# Altium PCB PCB3.PcbDoc
Units mm, origin at the board's own origin, x right, y up, seen from the top; angles counter-clockwise.
Board outline 90 x 92 mm, 2 copper layers (Top Layer, Bottom Layer); 24 components, 23 nets, 87 pads, 0 vias.
Unrouted connection lines stored in the file: 3.
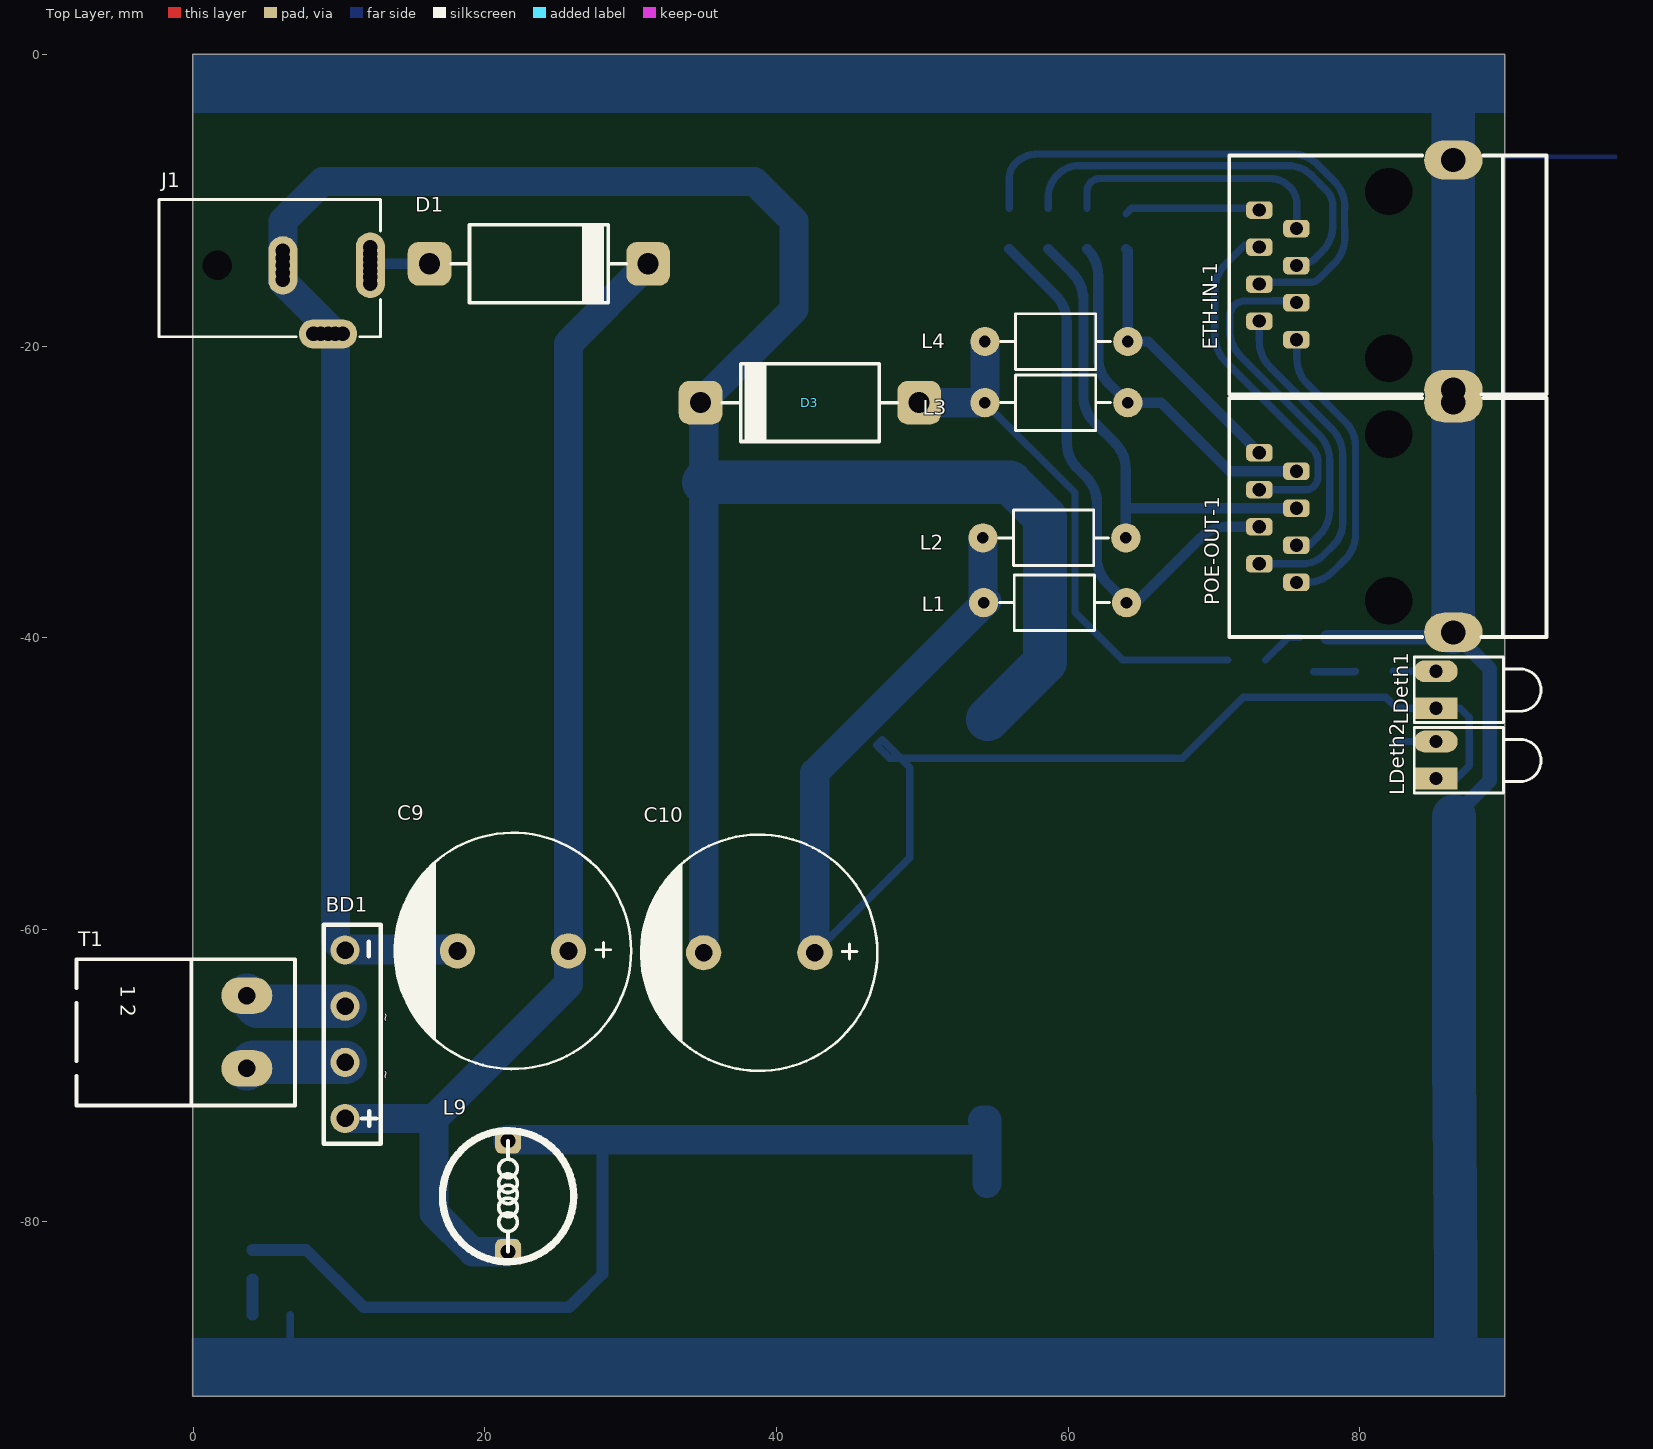
[diagram p0: Top Layer view]
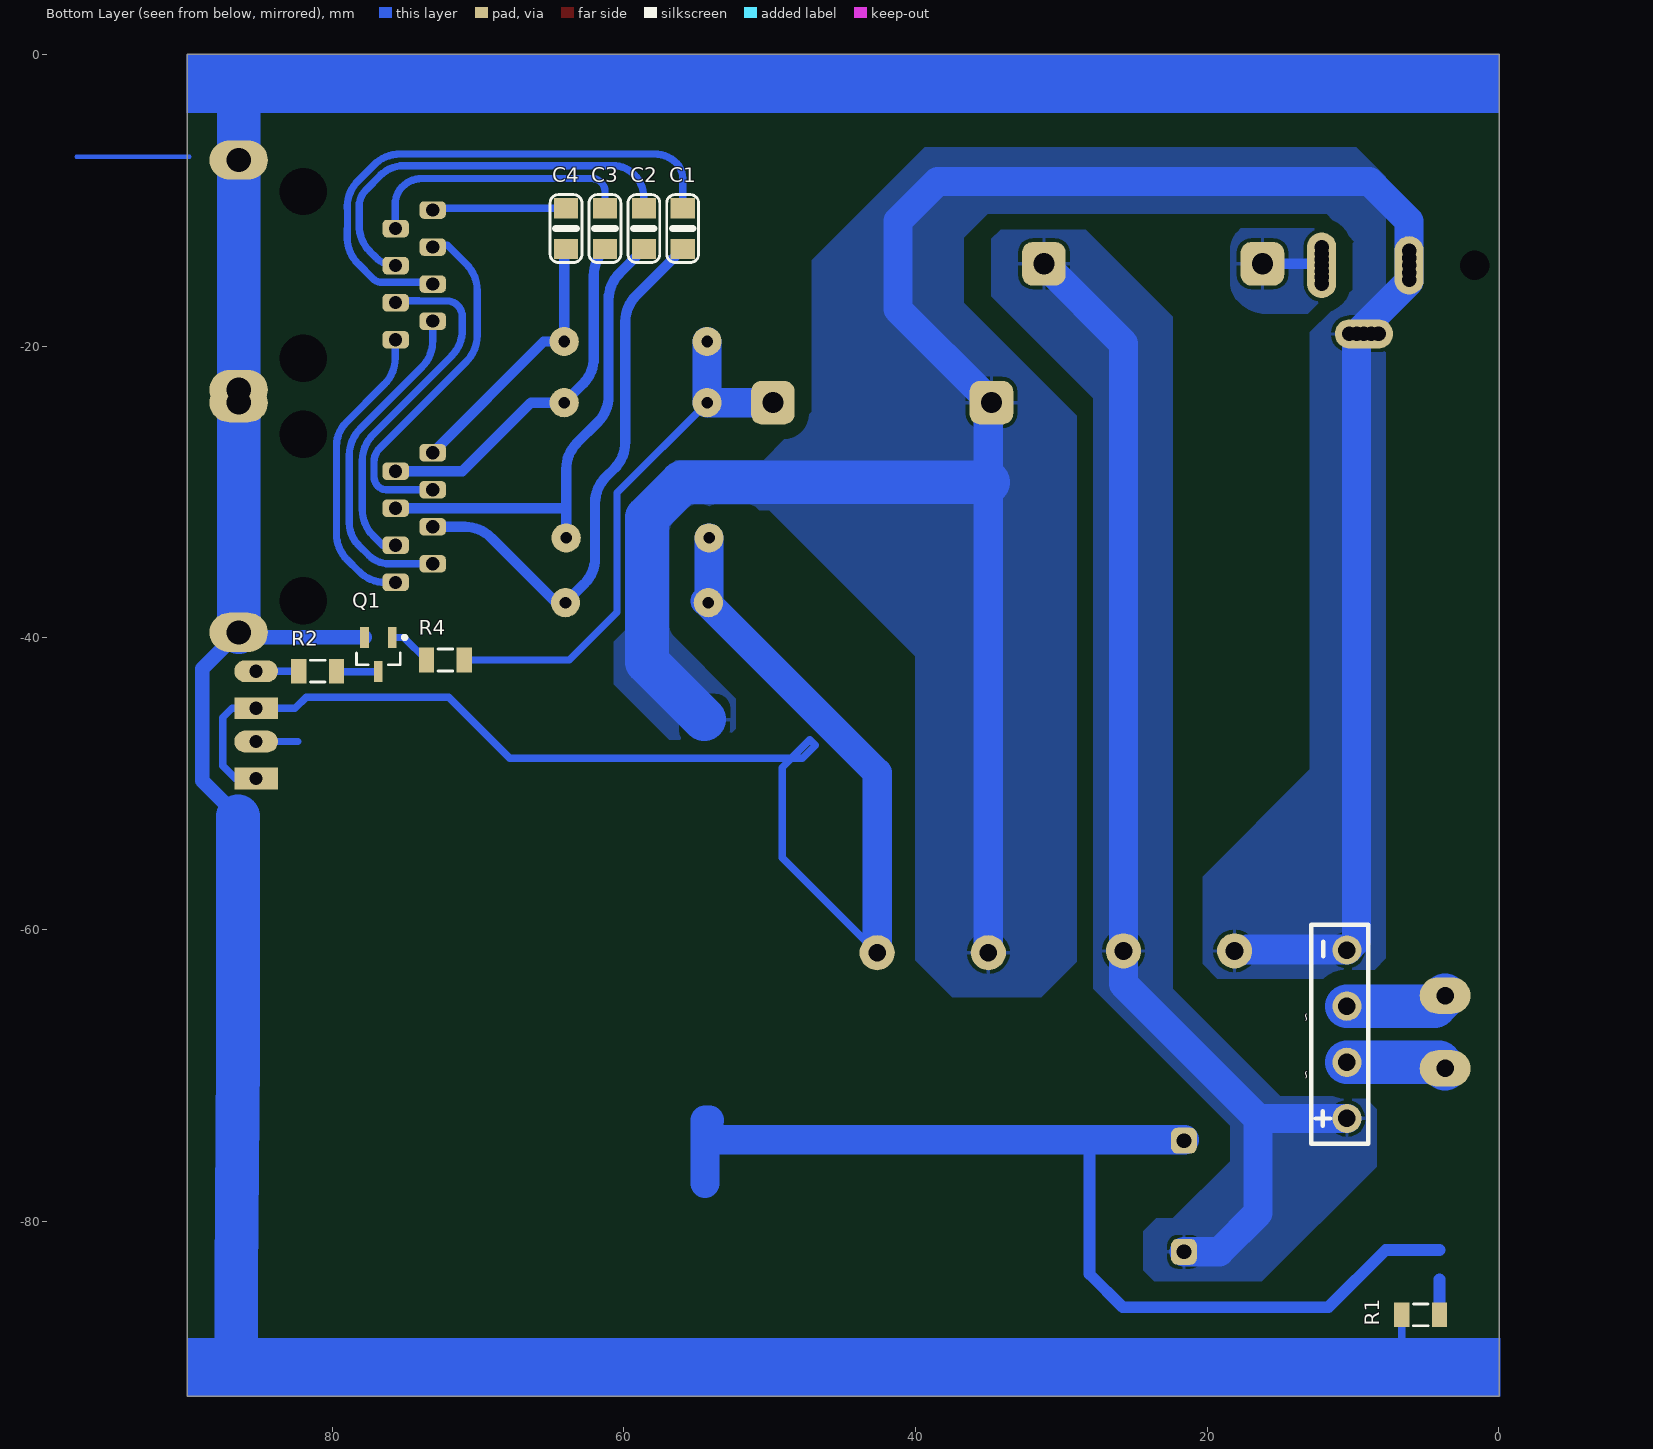
[diagram p1: Bottom Layer view, seen from below]
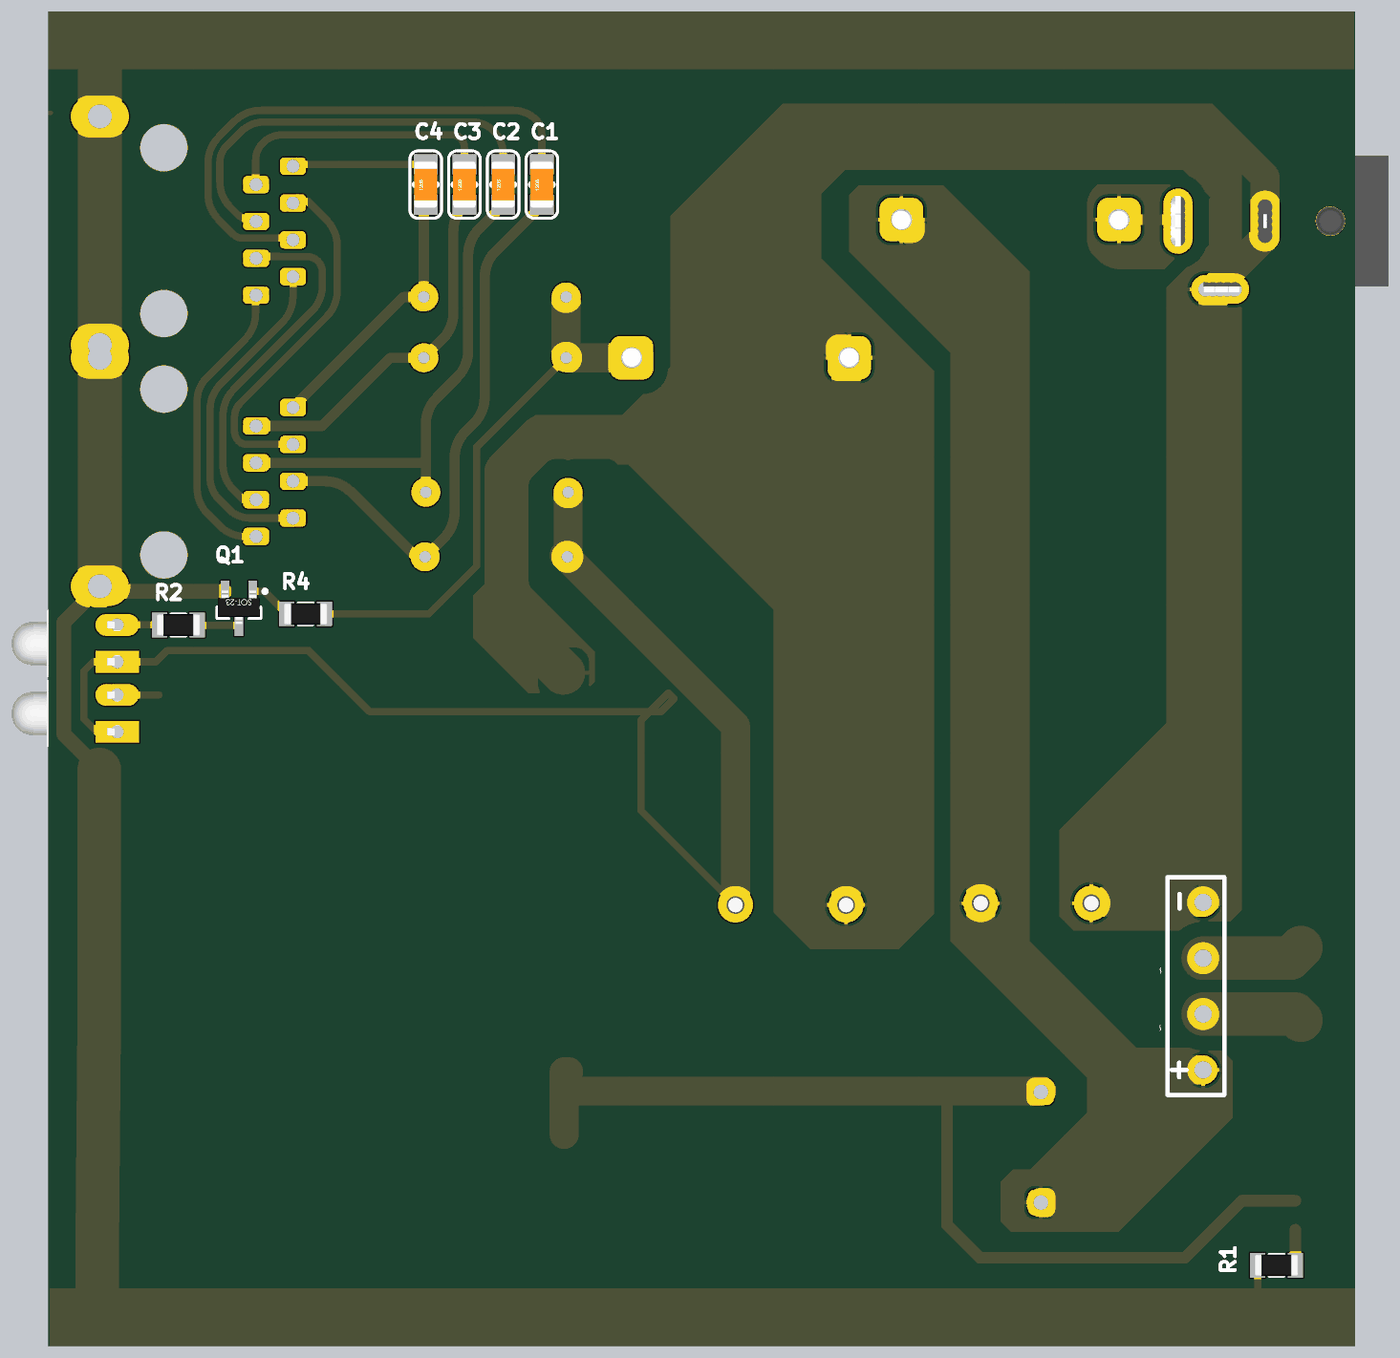
[diagram p2: 3D render of the assembled board from below, using the file's embedded part models]

## Layer stack, top to bottom
Top Solder: solder mask 0.0102, Solder Resist, Dk 3.5
Top Layer: signal copper 0.0356
Dielectric 1: dielectric 0.32, FR-4, Dk 4.8
Bottom Layer: signal copper 0.0356
Bottom Solder: solder mask 0.0102, Solder Resist, Dk 3.5

## Board outline
-0.043,-92 -0.043,0 89.957,0 89.957,-92

## Design rules (kind name [scope] priority, off if disabled: settings)
Clearance [All] p1: gap=0.3 ignorepadtopadclearanceinfootprint=FALSE
PolygonConnect [All] p1: connectstyle=Relief reliefconductorwidth=0.254 reliefentries=4 polygonreliefangle="90 Angle" airgapwidth=0.254
RoutingVias [All] p1: holewidth=0.711 width=1.27 viastyle="Through Hole" minholewidth=0.711 minwidth=1.27 maxholewidth=0.711 maxwidth=1.27
SolderMaskExpansion [All] p1: expansion=0.102 istentingtop=FALSE
Width [All] p1: maxlimit=3 minlimit=0.3 preferedwidth=0.4
30 further rules are at their usual default settings.

## Components (designator, comment, footprint, x,y, rotation, side; value= is the part's Value field where it differs from the comment)
BD1 "Bridge Diode" "Diode Bridge rectifier" 10.414,-67.186 r90 top
C1 "Capacitor SMD" "1206 Capacitor" 55.964,-11.938 r90 bottom
C2 "Capacitor SMD" "1206 Capacitor" 58.631,-11.938 r90 bottom
C3 "Capacitor SMD" "1206 Capacitor" 61.298,-11.938 r90 bottom
C4 "Capacitor SMD" "1206 Capacitor" 63.965,-11.938 r90 bottom
C9 "1000uF" "CAP 05" 21.928,-61.468 r0 top
C10 "1000uF" "CAP 05" 38.819,-61.595 r0 top
D1 "BYW98" BYW98 23.706,-14.351 r0 top
D3 "BYW98" BYW98 42.291,-23.876 r180 top
ETH-IN-1 "RJ45-w57-1" rj45-hb 86.364,-7.239 r270 top
J1 "Power Jack" "Power Jack" -2.351,-14.458 r0 top
L1 "300uH" inductor 54.282,-37.592 r90 top
L2 "300uH" inductor 54.229,-33.147 r90 top
L3 "300uH" inductor 54.366,-23.876 r90 top
L4 "300uH" inductor 54.366,-19.685 r90 top
L9 "10-100uH" "Inductor Radial" 21.59,-78.295 r270 top
LDeth1 "SMD LED" "LED 1 X  3mm GREEN RIGHT ANGLE" 85.217,-43.561 r90 top
LDeth2 "SMD LED" "LED 1 X  3mm GREEN RIGHT ANGLE" 85.217,-48.387 r90 top
POE-OUT-1 "RJ45-w57-1" rj45-hb 86.364,-23.877 r270 top
Q1 "BC817" SOT-23 76.835,-41.148 r0 bottom
R1 "10k" "RES 1206 (3216X08L)" 6.66,-86.423 r180 bottom
R2 "10k" "RES 1206 (3216X08L)" 79.7,-42.291 r0 bottom
R4 "10k" "RES 1206 (3216X08L)" 73.533,-41.529 r180 bottom
T1 "Phoenix terminal" "phoenix terminal 2" -8.001,-62.039 r270 top

## Footprints (in the part's own frame and the unit in brackets; to place one, negate y for a bottom-side part, rotate by r counter-clockwise, add the part's x,y. Pads: shape width x height; smd on the part's side, far side on the other; paste and mask are expansions set on the pad)
"1206 Capacitor" [mil]
  rect 55x65 smd: 1(-55,0) 2(55,0)
  silkscreen extent -92,-43 92,43, body extent -63,-31 63,31, height 39
BYW98 [mm]
  rrect50% 3x3 hole 1.448: 1(-7.493,0) 2(7.493,0)
  silkscreen extent -6,-2.67 6,2.67, body extent -8.14,-2.68 8.16,2.62, height 6.46
"CAP 05" [mil]
  round 95 hole 48: 1(150,0) 2(-150,0)
  silkscreen extent -319,-319 319,319, body extent -320,-320 320,320, height 651
"Diode Bridge rectifier" [mm]
  round 2 hole 1.2: 1(5.775,0) 2(1.925,0) 3(-1.925,0) 4(-5.775,0)
  silkscreen extent -7.5,-2.45 7.5,1.45, body extent -7.5,-2.45 7.5,1.45, height 13.1
inductor [mm]
  round 2 hole 0.8: 1(0,0.074) 2(0,-9.726)
  silkscreen extent -1.91,-8.54 1.91,-1.01
"Inductor Radial" [mil]
  rrect50% 70x70 hole 40: 1(-150,0) 2(150,0)
  silkscreen extent -177,-177 177,177, body extent -177,-177 177,177, height 464
"LED 1 X  3mm GREEN RIGHT ANGLE" [mm]
  rect 1.5x3 hole 0.9: 1(-1.27,0)
  oval 1.5x3 hole 0.9: 2(1.27,0)
  silkscreen extent -2.25,-7.21 2.25,1.48, body extent -2.31,-7.27 2.31,1.49, height 7.31
"phoenix terminal 2" [mm] "2 terminals"
  oval 2.5x3.5 hole 1.2: 1(2.493,11.684) 2(7.493,11.684)
  silkscreen extent 0,0 10.03,15
"Power Jack" [mm] "Power Adaptor Jack"
  round 1.5 hole 1: 1(14.5,-1.25) 1(14.5,-0.8) 1(14.5,-0.4) 1(14.5,0.4) 1(14.5,0.8) 1(14.5,1.25) 2(8.5,-1) 2(8.5,1) 2(8.5,-0.5) 2(8.5,0.5) 3(10.6,-4.7) 3(11.1,-4.7) 3(12.1,-4.7) 3(12.6,-4.7)
  oval 2x4.5 hole 1: 1(14.5,0)
  oval 2x4 hole 1: 2(8.5,0)
  oval 4x2 hole 1: 3(11.6,-4.7)
  round 1.9 hole 2: MH(4,0)
  silkscreen extent 0,-4.9 15.2,4.5, body extent 0,-4.9 15.2,4.5, height 11
"RES 1206 (3216X08L)" [mm] "Chip Resistor, 2-Leads, Body 3.2x1.6mm, IPC High Density _ (0.125 W)"
  rect 1.05x1.7 smd: 1(0,0) 2(2.596,0)
  silkscreen extent 0.8,-0.75 1.8,0.75, body extent -0.23,-0.76 2.82,0.76, height 0.6
rj45-hb [mm]
  rrect50% 1.2x1.8 hole 0.9: 1(12.319,-10.714) 2(11.049,-13.254) 3(9.779,-10.714) 4(8.509,-13.254) 5(7.239,-10.714) 6(5.969,-13.254) 7(4.699,-10.714) 8(3.429,-13.254)
  oval 2.7x4 hole 1.65: G1(15.749,0.046) G2(-0.001,0.046)
  rrect50% 1.8x1.8 hole 3.25: ""(2.159,-4.365) ""(13.589,-4.365)
  silkscreen extent -0.32,-15.31 16.06,6.44
SOT-23 [mm]
  rect 0.6x1.45 smd: 1(-0.95,-1.175) 2(0.95,-1.175) 3(0,1.175)
  silkscreen extent -1.92,-1.3 1.5,0.7, body extent -1.45,-1.23 1.45,1.07, height 1

## Part data
BD1: library part "Diode Bridge rectifier"
C9 C10: library part Cap-Polar, "Polar Capacitor", Voltage=50V, Adding Date=1387/12/20, Designer="Saeid Jorablo", Organazation=ControTec
D1 D3: "HIGH EFFICIENCY FAST RECOVERY RECTIFIER DIODES", Adding Date=1387/01/10, Company=ControTEK, Designer="Saeid Jorablo", IF(av)="3 A", Trr (max)="35 ns", Vrrm="200 V"
L1 L2 L3 L4 L9: library part "Inductor SMT"
LDeth1 LDeth2: library part "LED SMD"
R1 R2 R4: library part Resistor, "Resistor", Power="1/8 W", Tolerance=5%
T1: library part "Phoenix terminal 2", "Terminal 2 Pin", ComponentLinkURL=www.picpars.com, Designer="Seyed Mohsen Ghasemain", E-mail=picpars@gmail.com
J1: Adding Date=10/21/2009, Company=Personal, Designer="Saeid Jorablo", Project Name=Laser

## Nets (pads, with @x,y where several pads share a name; then routed paths per layer and width w, separated by ;. In a path a pad name is that pad's centre, name@x,y a point inside that pad or via, vN(x,y) a via of type N, cw(c..) or ccw(c..) an arc to the next point about the centre after c; other vN are vias at no path point)
1TxRxA+: ETH-IN-1.1 POE-OUT-1.1 | length 20.7
  Bottom Layer w0.5: POE-OUT-1.1 76.374,-36.196 ccw(c76.374,-33.656) 78.17,-35.452 78.969,-34.653 ccw(c77.173,-32.857) 79.713,-32.857 79.713,-26.865 ccw(c77.402,-26.865) 79.037,-25.232 ccw(c77.402,-26.865) 79.036,-25.231 76.427,-22.622 cw(c78.223,-20.826) 75.683,-20.826 ETH-IN-1.1@75.683,-19.43
1TxRxA-: ETH-IN-1.2 POE-OUT-1.2 | length 23.3
  Bottom Layer w0.5: POE-OUT-1.2 76.073,-34.926 ccw(c76.073,-32.886) 77.516,-34.328 78.195,-33.649 ; ETH-IN-1.2 73.109,-19.649 ccw(c75.649,-19.649) 73.143,-20.063 ccw(c75.649,-19.649) 73.853,-21.445 78.08,-25.672 cw(c76.284,-27.468) 78.824,-27.468 78.824,-32.131 cw(c76.678,-32.131) 78.196,-33.648 ; ETH-IN-1.2@73.143,-18.288 ETH-IN-1.2@73.143,-18.16
1TxRxB+: ETH-IN-1.3 POE-OUT-1.3 | length 24.9
  Bottom Layer w0.5: POE-OUT-1.3 76.537,-33.656 77.194,-32.999 ccw(c75.407,-31.211) 77.935,-31.211 77.935,-27.849 ccw(c75.395,-27.849) 77.191,-26.053 71.821,-20.683 cw(c73.617,-18.887) 71.077,-18.887 71.077,-17.976 cw(c72.163,-17.976) 71.394,-17.209 cw(c72.143,-17.956) 72.143,-16.898 74.061,-16.898 74.069,-16.89 ETH-IN-1.3@75.683,-16.89
1TxRxB-: ETH-IN-1.6 POE-OUT-1.6 | length 25
  Bottom Layer w0.5: POE-OUT-1.6 76.298,-29.846 ccw(c76.298,-29.054) 76.857,-29.615 ; ETH-IN-1.6@73.143,-13.08 72.094,-13.08 70.805,-14.369 ccw(c72.601,-16.165) 70.061,-16.165 70.061,-19.268 ccw(c72.601,-19.268) 70.805,-21.064 76.749,-27.008 cw(c75.817,-27.94) 77.135,-27.94 77.135,-28.945 cw(c76.189,-28.945) 76.859,-29.613
1TxRxC+: C1.2 ETH-IN-1.4 | length 37.9
  Bottom Layer w0.5: C1.2 55.964,-8.473 cw(c57.411,-8.473) 56.388,-7.45 cw(c57.909,-8.971) 57.909,-6.82 75.331,-6.82 cw(c75.331,-9.36) 76.985,-7.432 cw(c75.331,-9.36) 77.127,-7.564 78.223,-8.659 cw(c76.427,-10.455) 78.355,-8.802 cw(c76.427,-10.455) 78.951,-10.174 ; ETH-IN-1.4@73.143,-15.62 74.689,-15.62 74.697,-15.628 76.581,-15.628 ccw(c76.581,-14.725) 77.219,-15.364 78.223,-14.36 ccw(c76.427,-12.564) 78.951,-12.85 ccw(c76.427,-12.564) 78.967,-12.564 78.967,-11.938 ; 78.951,-11.938 78.951,-10.174 ; 78.967,-10.541 78.967,-10.455 ccw(c76.427,-10.455) 78.951,-10.174
1TxRxC+DC+: C1.1 L1.2 POE-OUT-1.4 | length 38.3
  Bottom Layer w0.7: C1.1 59.157,-16.528 cw(c57.361,-18.324) 59.901,-18.324 59.901,-26.591 ccw(c62.441,-26.591) 60.645,-28.387 61.232,-28.974 cw(c59.436,-30.77) 61.976,-30.77 61.976,-34.508 ccw(c64.516,-34.508) 62.72,-36.304 L1.2 64.643,-37.592 69.105,-33.13 cw(c70.901,-34.926) 70.901,-32.386 POE-OUT-1.4
1TxRxC-: C2.2 ETH-IN-1.5 | length 28.3
  Bottom Layer w0.5: C2.2 58.631,-9.818 cw(c60.872,-9.818) 59.287,-8.234 ; 59.287,-8.234 cw(c60.769,-9.715) 59.289,-8.232 cw(c60.769,-9.715) 60.769,-7.62 75.071,-7.62 cw(c75.071,-9.935) 76.708,-8.298 77.675,-9.265 cw(c76.526,-10.414) 78.151,-10.414 78.151,-11.729 cw(c75.611,-11.729) 77.407,-13.525 77.023,-13.909 cw(c75.649,-12.535) 76.343,-14.35 cw(c75.649,-12.535) ETH-IN-1.5
1TxRxC-DC+: C2.1 L2.2 POE-OUT-1.5 | length 33.4
  Bottom Layer w0.7: C2.1 60.3,-15.004 cw(c58.504,-16.8) 61.044,-16.8 61.044,-23.416 ccw(c63.584,-23.416) 61.788,-25.212 63.211,-26.635 cw(c61.415,-28.431) 63.955,-28.431 63.955,-31.242 ; L2.2 63.955,-31.242 ; POE-OUT-1.5 64.081,-31.116 63.955,-31.242
1TxRxD+: C3.2 ETH-IN-1.7 | length 18.6
  Bottom Layer w0.5: C3.2 61.298,-9.376 cw(c62.165,-9.376) 61.552,-8.763 cw(c62.165,-9.376) 62.165,-8.509 73.854,-8.509 cw(c73.854,-10.39) 75.184,-9.06 cw(c73.979,-10.265) 75.683,-10.265 ETH-IN-1.7@75.683,-11.81
1TxRxD+DC-: C3.1 L3.2 POE-OUT-1.7 | length 25
  Bottom Layer w0.7: C3.1 61.32,-13.357 cw(c59.524,-15.153) 62.064,-15.153 62.064,-16.891 ; 62.06,-16.891 62.06,-20.792 ccw(c64.6,-20.792) 62.804,-22.588 L3.2 66.378,-23.876 71.078,-28.576 POE-OUT-1.7
1TxRxD-: C4.2 ETH-IN-1.8 | length 9.3
  Bottom Layer w0.5: C4.2@63.965,-10.922 64.346,-10.541 73.142,-10.541 ETH-IN-1.8@73.143,-10.54
1TxRxD-DC-: C4.1 L4.2 POE-OUT-1.8 | length 18.6
  Bottom Layer w0.7: C4.1 64.092,-13.462 L4.2 65.488,-19.685 POE-OUT-1.8
+12: BD1.4 C9.1 D1.2 L9.2 | length 83.5
  Bottom Layer w2: BD1.4 16.51,-72.961 ; L9.2 19.177,-82.105 16.51,-79.438 16.51,-72.961 ; D1.2 25.738,-19.812 C9.1 25.738,-63.733 16.51,-72.961
eth1: D3.1 L3.1 L4.1 R4.2 | length 37.5
  Bottom Layer w0.5: L3.1 60.47,-30.054 60.47,-38.245 63.754,-41.529 R4.2
  Bottom Layer w2: D3.1 L3.1 L4.1
GND: BD1.1 C9.2 C10.2 D3.2 J1.2 J1.3 Q1.2 R1.1 | length 339.4
  Bottom Layer w0.5: 6.66,-89.733 R1.1 ; 86.438,-52.244 86.453,-52.259
  Bottom Layer w0.7: BD1.1@10.371,-60.689 J1.3@10.371,-19.78 ; BD1.1@10.414,-60.689 C9.2@17.339,-60.689
  Bottom Layer w1: Q1.2 86.063,-39.973 86.41,-39.626 88.9,-42.116 88.9,-49.812 86.453,-52.259
  Bottom Layer w2: C9.2 18.061,-61.411 BD1.1 9.749,-60.746 9.749,-19.158 6.149,-15.558 6.149,-14.958 6.149,-13.958 6.149,-11.44 8.89,-8.699 38.481,-8.699 41.211,-11.429 41.211,-17.463 35.009,-23.665 35.009,-29.337 C10.2
  Bottom Layer w3: 35.009,-29.337 56.007,-29.337 58.42,-31.75 58.42,-41.656 54.483,-45.593 ; 86.41,-39.626 86.41,-23.876 86.41,-22.988 86.41,-7.238 86.41,-2.209 ; 86.453,-52.259 86.453,-68.009 86.453,-68.896 86.58,-83.757 86.58,-90.204
NetBD1_2: BD1.2 T1.1 | length 7
  Bottom Layer w3: T1.1 4.412,-65.261 BD1.2
NetBD1_3: BD1.3 T1.2 | length 6.9
  Bottom Layer w3: T1.2 4.104,-69.111 BD1.3
NetD1_1: D1.1 J1.1 | length 4.2
  Bottom Layer w0.7: J1.1@12.149,-14.058 12.442,-14.351 D1.1
NetLDeth1_2: LDeth1.2 R2.2 | length 2.9
  Bottom Layer w0.5: R2.2 LDeth1.2
NetLDeth2_2: LDeth2.2 R1.2 | length 5.3
  Bottom Layer w0.5: 82.352,-47.117 LDeth2.2
  Bottom Layer w0.8: R1.2 4.064,-83.978
NetQ1_1: Q1.1 R4.1 | length 3
  Bottom Layer w0.5: R4.1 75.089,-39.973 Q1.1
NetQ1_3: Q1.3 R2.1 | length 2.9
  Bottom Layer w0.5: Q1.3 79.668,-42.323 R2.1
VCC: C10.1 L1.1 L2.1 L9.1 LDeth1.1 LDeth2.1 | length 176.1
  Bottom Layer w0.5: C10.1 49.149,-55.075 49.149,-48.895 48.514,-48.26 ; LDeth2.1 86.614,-49.657 87.503,-48.768 87.503,-45.466 86.868,-44.831 LDeth1.1 82.55,-44.831 81.788,-44.069 72.009,-44.069 67.818,-48.26 48.514,-48.26 ; 48.514,-48.26 47.244,-46.99 46.863,-47.371 47.752,-48.26 48.514,-48.26
  Bottom Layer w0.8: 4.064,-81.978 7.747,-81.978 11.684,-85.915 25.781,-85.915 28.067,-83.629 28.067,-74.422
  Bottom Layer w2: L9.1@21.547,-74.422 28.067,-74.422 54.419,-74.422 54.419,-73.089 ; C10.1 42.629,-49.255 54.419,-37.465 L1.1@54.366,-37.412 ; 54.123,-73.089 54.419,-73.089 ; L2.1 54.155,-37.539 L1.1 ; 54.428,-77.407 54.428,-73.089 54.419,-73.089
pads on no net: ETH-IN-1. ETH-IN-1.G1 ETH-IN-1.G2 J1.MH POE-OUT-1. POE-OUT-1.G1 POE-OUT-1.G2
copper on no net: | length 7.7
  Bottom Layer w0.3: 89.789,-7 97.536,-7

## Polygon pours and split planes (outlines as drawn)
GND on Bottom Layer "Bottom Layer-GND 1" (solid, pour order 10): 20.32,-62.357 19.304,-63.373 9.144,-63.373 7.747,-61.976 7.747,-8.382 9.779,-6.35 39.37,-6.35 47.117,-14.097 47.117,-24.511 50.419,-27.813 57.912,-27.813 60.706,-30.607 60.706,-43.18 56.769,-47.117 53.213,-47.117 52.197,-46.101 52.197,-43.942 56.388,-39.751 56.388,-32.512 54.991,-31.115 54.864,-31.242 50.038,-31.242 40.005,-41.275 40.005,-62.103 37.465,-64.643 31.369,-64.643 28.956,-62.23 28.956,-24.765 36.703,-17.018 36.703,-12.573 35.052,-10.922 11.811,-10.922 9.906,-12.827 10.033,-12.954 10.033,-16.129 12.954,-19.05 12.954,-49.022 20.32,-56.388
NetD1_1 on Bottom Layer "Bottom Layer-NetD1_1" (solid, pour order 14): 10.668,-12.319 cw(c10.361,-12.626) 10.795,-12.626 10.795,-16.383 12.065,-17.653 ccw(c12.372,-17.346) 12.372,-17.78 16.002,-17.78 ccw(c16.002,-15.327) 17.736,-17.062 17.907,-16.891 ccw(c16.681,-15.665) 18.415,-15.665 18.415,-13.368 ccw(c16.681,-13.368) 17.907,-12.142 17.576,-11.811 ccw(c16.35,-13.037) 16.35,-11.303 12.238,-11.303 ccw(c12.238,-13.254) 10.858,-11.874
+12 on Bottom Layer "Bottom Layer-+12" (solid, pour order 2): 22.352,-17.97 28.321,-12.001 34.163,-12.001 34.798,-12.636 34.798,-16.573 27.813,-23.558 27.813,-64.071 18.415,-73.469 18.415,-75.882 22.352,-79.819 23.495,-79.819 24.384,-80.708 24.384,-83.375 23.622,-84.137 16.256,-84.137 8.382,-76.263 8.382,-72.326 9.271,-71.437 14.986,-71.437 22.352,-64.071 22.352,-18.097

## Other copper
Bottom Layer:
  rectangle net GND: -0.127,-92.011 89.873,-88.011
  rectangle net GND: 0,-4 90,0

## Silkscreen, mask and mechanical layers (free items; w line width, h text height)
Mechanical 1:
  lines w0.254: 89.957,-92 -0.043,-92 -0.043,0 89.957,0 ; 89.968,-92.011 90,0

## Text inside footprints (layer, text, board x,y; h text height)
BD1: Top Overlay "~" at 13.664,-70.311 h1 r90; Top Overlay "~" at 13.639,-66.361 h1 r90; Bottom Overlay "~" at 13.639,-66.361 h1 r90; Bottom Overlay "~" at 13.664,-70.311 h1 r90
T1: Top Overlay "1 2" at -4.953,-63.817 h1 r270